# Altium PCB iq-adapter-v1.PcbDoc
Units mm, origin at the board's own origin, x right, y up, seen from the top; angles counter-clockwise.
Board outline 21.1 x 16.5 mm, 2 copper layers (Top Layer, Bottom Layer), stack 1.569 mm thick; 3 components, 9 nets, 76 pads, 13 vias.
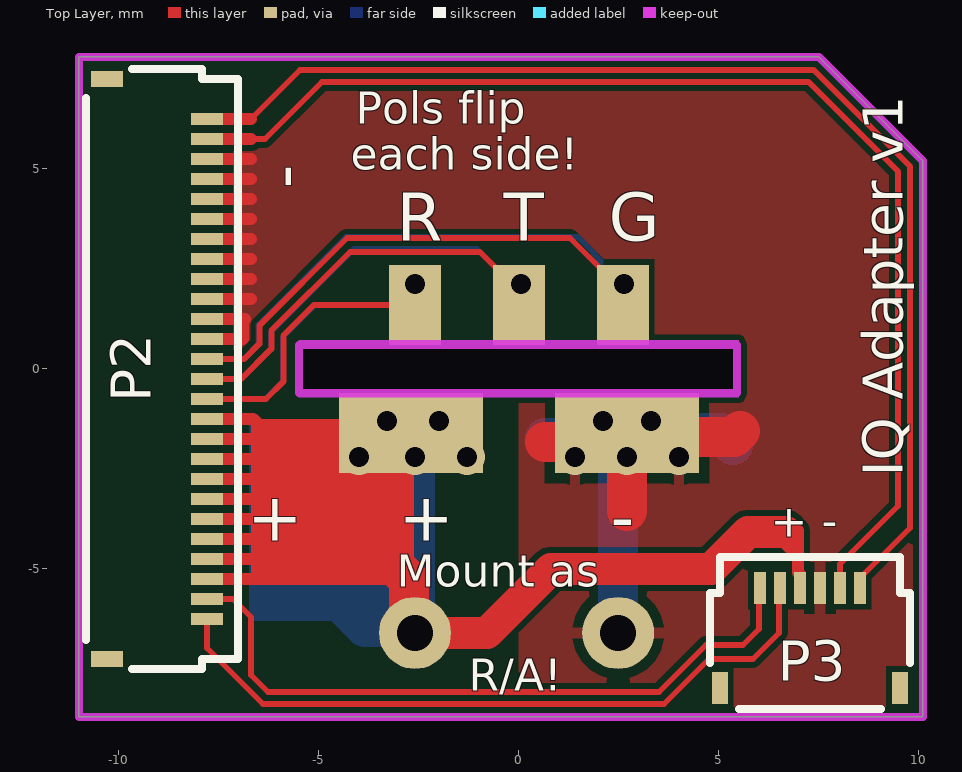
[diagram p0: Top Layer view]
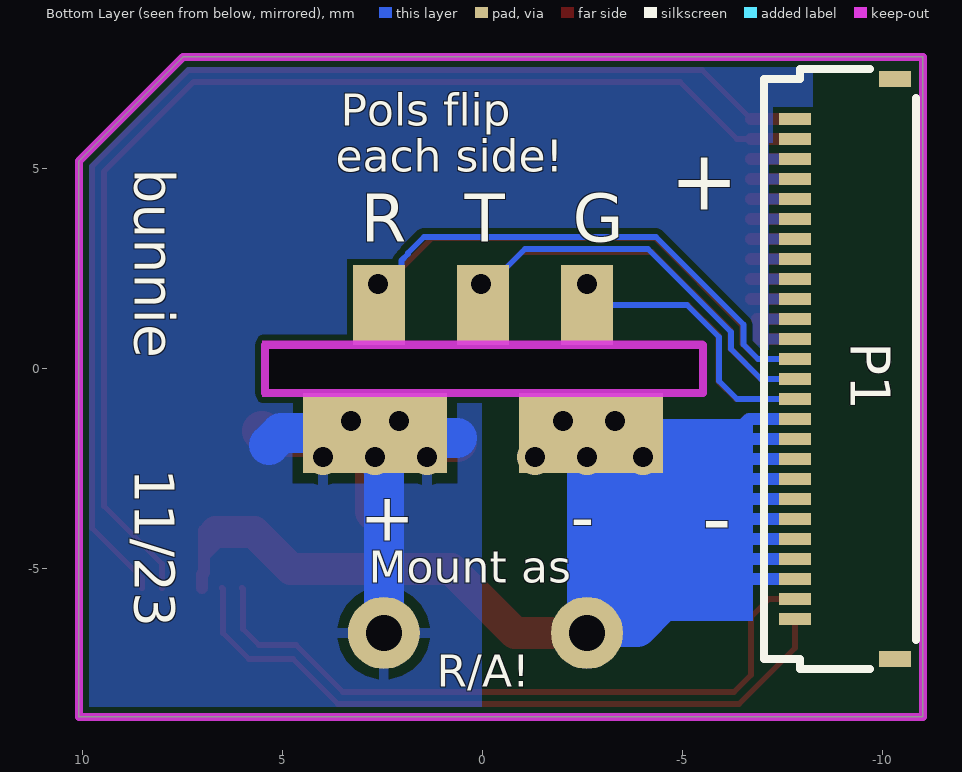
[diagram p1: Bottom Layer view, seen from below]

## Layer stack, top to bottom
Top Solder: solder mask 0.0254, SM-001, Dk 4
Top Layer: signal copper 0.035
Dielectric 1: core 1.4986, Core-043, Dk 4.3
Bottom Layer: signal copper 0.035
Bottom Solder: solder mask 0.0254, SM-001, Dk 4

## Board outline
-11,-8.7 10.1,-8.7 10.1,5.2 7.5,7.8 -11,7.8
cut-out: -5.5,0.6 5.45,0.6 5.45,-0.6 -5.5,-0.6
cut-out: -5.5,0.7 -5.5,-0.7 5.5,-0.7 5.5,0.7

## Design rules (kind name [scope] priority, off if disabled: settings)
Clearance [All] p1: gap=0.15 ignorepadtopadclearanceinfootprint=FALSE except(0: Arc-Hole Track-Hole SMDPad-Hole THPad-Hole Via-Hole Fill-Hole Poly-Hole Region-Hole Text-Hole)
PolygonConnect [All] p1: connectstyle=Relief reliefconductorwidth=0.254 reliefentries=4 polygonreliefangle="90 Angle" airgapwidth=0.254
RoutingVias [All] p1: holewidth=0.5 width=0.9 viastyle="Through Hole" minholewidth=0.5 minwidth=0.9 maxholewidth=0.5 maxwidth=0.9
SolderMaskExpansion [All] p1: expansion=0.102 istentingtop=FALSE
Width [All] p1: maxlimit=10 minlimit=0.15 preferedwidth=0.3
30 further rules are at their usual default settings.

## Components (designator, comment, footprint, x,y, rotation, side; value= is the part's Value field where it differs from the comment)
P1 "26-pin FPC" HRS_FH34SRJ-26S-0.5SH(50) -7.8,0 r90 bottom
P2 "26-pin FPC" HRS_FH34SRJ-26S-0.5SH(50) -7.8,0 r270 top
P3 "FH34SRJ-6S-0.5SH(50)" HRS_FH34SRJ-6S-0.5SH(50) 7.275,-5.475 r0 top

## Footprints (in the part's own frame and the unit in brackets; to place one, negate y for a bottom-side part, rotate by r counter-clockwise, add the part's x,y. Pads: shape width x height; smd on the part's side, far side on the other; paste and mask are expansions set on the pad)
HRS_FH34SRJ-6S-0.5SH(50) [mm] "Top/bottom entry, back-lock 0.3mm thick FPC, 6 pins"
  rect 0.4x0.8 smd mask+0.07: 0(-2.25,-2.5) 0(2.25,-2.5)
  rect 0.3x0.8 smd mask+0.07: 1(1.25,0) 2(0.75,0) 3(0.25,0) 4(-0.25,0) 5(-0.75,0) 6(-1.25,0)
  silkscreen extent -2.5,-3.03 2.5,0.77, body extent -2.5,-3.02 2.5,0.78, height 1
HRS_FH34SRJ-26S-0.5SH(50) [mm] "Top/bottom entry, back-lock 0.3mm thick FPC, 26 pins"
  rect 0.4x0.8 smd mask+0.07: 0(-7.25,-2.5) 0(7.25,-2.5)
  rect 0.3x0.8 smd mask+0.07: 1(6.25,0) 2(5.75,0) 3(5.25,0) 4(4.75,0) 5(4.25,0) 6(3.75,0) 7(3.25,0) 8(2.75,0) 9(2.25,0) 10(1.75,0) 11(1.25,0) 12(0.75,0) 13(0.25,0) 14(-0.25,0) 15(-0.75,0) 16(-1.25,0) 17(-1.75,0) 18(-2.25,0) 19(-2.75,0) 20(-3.25,0) 21(-3.75,0) 22(-4.25,0) 23(-4.75,0) 24(-5.25,0) 25(-5.75,0) 26(-6.25,0)
  silkscreen extent -7.5,-3.03 7.5,0.77, body extent -7.5,-3.03 7.5,0.77, height 1

## Part data
P1 P2: library part FPC-26, "26 Pin FPC header", MPN=FH34SRJ-26S-0.5SH(99), MYPN=J-FPC-0.5mm-26-0.3mm-T/B, System=Connector, VENDOR=Hirose
P3: library part "Header 6", "Header, 6-Pin", LatestRevisionDate=17-Jul-2002, LatestRevisionNote="Re-released for DXP Platform.", MPN=FH34SRJ-6S-0.5SH(50), MYPN=J-FH34SRJ-6S-0.5SH(50), Publisher="Altium Limited", VENDOR=HRS

## Free pads (board coordinates)
  rect 3.6x2 smd mask+0.07: 1(-2.7,-1.6) 1(2.7,-1.6)
  rect 3.6x2 smd far side mask+0.07: 1(-2.7,-1.6) 1(2.7,-1.6)
  round 1.8 hole 0.9 mask+0.07: 1(-2.6,-6.6) 5(2.48,-6.6)
  rect 1.3x2 smd mask+0.07: 2(-2.6,1.6) 3(2.6,1.6) 4(0,1.6)
  rect 1.3x2 smd far side mask+0.07: 2(2.6,1.6) 3(-2.6,1.6) 4(0,1.6)

## Via types
v1: diameter 0.9, hole 0.5, Top Layer to Bottom Layer, tented both sides, 13 vias

## Nets (pads, with @x,y where several pads share a name; then routed paths per layer and width w, separated by ;. In a path a pad name is that pad's centre, name@x,y a point inside that pad or via, vN(x,y) a via of type N, cw(c..) or ccw(c..) an arc to the next point about the centre after c; other vN are vias at no path point)
ESTOP1: P2.2 P3.6 | length 17.3
  Top Layer w0.15: P2.2 -7.15,-5.75 -6.7,-6.2 -6.7,-7.651 -6.276,-8.075 3.501,-8.075 4.676,-6.9 5.6,-6.9 6,-6.5 6,-5.5 P3.6
ESTOP2: P2.1 P3.5 | length 17.5
  Top Layer w0.15: P2.1 -7.8,-6.975 -6.4,-8.375 3.625,-8.375 4.75,-7.25 5.85,-7.25 6.5,-6.6 6.5,-5.5 P3.5
GND: P1.3 P1.4 P1.5 P1.6 P1.7 P1.8 P1.9 P1.10 P1.11 P1.12 P2.15 P2.16 P2.17 P2.18 P2.19 P2.20 P2.21 P2.22 P2.23 P2.24 P3.3 pad.1@2.7,-1.6 pad.5 | length 27.4
  Top Layer w0.3: P2.15 -6.9,0.75 -6.9,1.205 -6.855,1.25 P2.16 ; P2.17 -6.7,1.75 ; P2.18 -6.7,2.25 ; P2.19 -6.7,2.75 ; P2.20 -6.7,3.25 ; P2.21 -6.7,3.75 ; P2.22 -6.7,4.25 ; P2.23 -6.7,4.75 ; P2.24 -6.7,5.25
  Top Layer w1: 0.646,-1.827 2.573,-1.827 pad.1@2.7,-1.7 ; 2.7,-3.55 v1(2.7,-2.2) pad.1@2.7,-1.7 ; 5.525,-1.55 5.375,-1.7 pad.1@2.7,-1.7
  Bottom Layer w1: 0.646,-1.727 2.573,-1.727 2.7,-1.6 5.05,-1.6 5.35,-1.9 ; pad.5 2.48,-2.42 v1(2.7,-2.2)
  other v1: 1.4,-2.2 4,-2.2 2.1,-1.3 3.3,-1.3
P24V: P1.16 P1.17 P1.18 P1.19 P1.20 P1.21 P1.22 P1.23 P1.24 P2.3 P2.4 P2.5 P2.6 P2.7 P2.8 P2.9 P2.10 P2.11 P3.4 pad.1@-2.6,-6.6 pad.1@-2.7,-1.6 | length 43.7
  Top Layer w0.3: P2.3 -6.7,-5.25 ; P2.4 -6.7,-4.75 ; P2.5 -6.7,-4.25 ; P2.6 -6.7,-3.75 ; P2.7 -6.7,-3.25 ; P2.8 -6.7,-2.75 ; P2.9 -6.7,-2.25 ; P2.10 -6.7,-1.75 ; P2.11 -6.65,-1.25 -6.4,-1.5 ; 6.614,-4.312 6.975,-4.674 ; 6.675,-4.075 6.975,-4.375 ; 6.947,-4.007 6.975,-4.035 6.975,-4.375 ; P3.4 7.025,-5.137 6.975,-5.087 6.975,-4.674 ; 6.975,-4.674 6.975,-4.375
  Top Layer w0.8: pad.1@-2.6,-6.6 -0.8,-6.6 0.8,-5 4.8,-5 5.725,-4.075 6.675,-4.075
  Top Layer w1: -4.663,-3.325 -4.663,-3.363 -2.753,-5.272 -2.753,-6.447 pad.1@-2.6,-6.6
  Bottom Layer w0.3: P1.24 -6.75,-5.25 ; P1.23 -6.75,-4.75 ; P1.22 -6.75,-4.25 ; P1.21 -6.75,-3.75 ; P1.20 -6.75,-3.25 ; P1.19 -6.75,-2.75 ; P1.18 -6.75,-2.25 ; P1.17 -6.75,-1.75 ; P1.16 -6.65,-1.25 -6.3,-1.6
  Bottom Layer w1: -4.4,-5.9 -3.853,-6.447 -2.753,-6.447 -2.6,-6.6 v1(-2.6,-2.2)
  other v1: -4,-2.2 -1.3,-2.2 -3.3,-1.3 -2,-1.3
RX: P1.15 P2.12 pad.2@-2.6,1.6 pad.3@-2.6,1.6 | length 13.7
  Top Layer w0.15: P2.12 -6.325,-0.75 -5.89,-0.315 -5.89,0.837 -5.127,1.6 pad.2@-2.6,1.6
  Bottom Layer w0.15: P1.15 -6.35,-0.75 -5.9,-0.3 -5.9,0.8 -5.1,1.6 pad.3@-2.6,1.6
  other v1: -2.6,2.125
SGND: P1.13 P2.14 pad.2@2.6,1.6 pad.3@2.6,1.6 | length 25
  Top Layer w0.15: P2.14 -6.87,0.25 -6.49,0.63 -6.49,1.085 -4.3,3.275 1.275,3.275 pad.3@2.525,2.025
  Bottom Layer w0.15: P1.13 -6.874,0.25 -6.512,0.612 -6.512,1.113 -4.325,3.3 1.475,3.3 1.875,2.9 1.875,2.875 2.041,2.709 2.041,2.525 2.441,2.125 v1(2.625,2.125)
TX: P1.14 P2.13 pad.4 | length 19.5
  Top Layer w0.15: P2.13 -6.945,-0.25 -6.19,0.506 -6.19,0.961 -4.226,2.925 -0.975,2.925 pad.4@-0.063,2.013
  Bottom Layer w0.15: P1.14 -6.95,-0.25 -6.2,0.5 -6.2,0.924 -4.124,3 -1.05,3 -0.175,2.125 v1(0.05,2.125)
UART1_RX: P2.25 P3.2 | length 29.8
  Top Layer w0.15: -6.7,5.75 -6.35,5.75 -4.925,7.175 7.241,7.175 9.475,4.941 9.475,-3.425 8.025,-4.875 P3.2
  Top Layer w0.3: P2.25 -6.7,5.75
UART1_TX: P2.26 P3.1 | length 30.1
  Top Layer w0.15: -6.7,6.25 -5.475,7.475 7.365,7.475 9.775,5.065 9.775,-3.975 8.525,-5.225 P3.1
  Top Layer w0.3: P2.26 -6.7,6.25
pads on no net: P1.0 P1.1 P1.2 P1.25 P1.26 P2.0 P3.0

## Polygon pours and split planes (outlines as drawn)
GND on Bottom Layer "GND_L02_P001" (solid, remove dead copper, pour order 1): -0.025,-0.6 0.025,-0.65 0.025,-8.7 10.1,-8.7 10.1,7.9 -8.2,7.9 -8.25,7.85 -8.25,-0.7 -0.125,-0.7
GND on Top Layer "GND_L01_P000" (solid, remove dead copper, pour order 0): -7.8,0.25 -7.65,0.4 -7.65,7.825 8.925,7.825 10.1,9 10.1,-8.7 1.125,-8.7 0,-7.575 0,-0.7

## Keep-outs
Keep-Out Layer:
  lines w0.2: -11,-8.7 10.1,-8.7 10.1,5.2 7.5,7.8 -11,7.8 -11,-8.7 ; -5.5,-0.6 5.45,-0.6 5.45,0.6 -5.5,0.6 -5.5,-0.6

## Other copper
Top Layer:
  rectangle net P24V: -6.7,-5.4 -2.625,-1.25
Bottom Layer:
  rectangle net P24V: -6.75,-6.3 -2.7,-1.25

## Silkscreen, mask and mechanical layers (free items; w line width, h text height)
Top Overlay:
  text "Pols flip" at -4.075,6.125 h0.8
  text "-" at -5.3,5.1 h1.2 r90
  text "each side!" at -4.2,4.975 h0.8
  text "R" at -3.05,3.2 h1.2
  text "T" at -0.375,3.2 h1.2
  text "G" at 2.25,3.2 h1.2
  text "IQ Adapter v1" at 9.6,-2.7 h1 r90
  text "+ -" at 6.3,-4.2 h0.8
  text "+" at -5.4,-4.3 h1.2
  text "+" at -3,-4.3 h1.2
  text "-" at 2.3,-4.3 h1.2
  text "Mount as" at -3.05,-5.45 h0.8
  text "R/A!" at -1.25,-8.05 h0.8
Bottom Overlay:
  text "Pols flip" at 3.55,6.075 h0.8
  text "bunnie" at 8.7,5 h1 r90
  text "each side!" at 3.675,4.925 h0.8
  text "+" at -6.4,3.975 h1.5
  text "G" at -2.25,3.175 h1.2
  text "T" at 0.45,3.175 h1.2
  text "R" at 3.05,3.175 h1.2
  text "11/23" at 8.7,-2.5 h1 r90
  text "-" at -2.2,-4.3 h1.2
  text "+" at 3.075,-4.3 h1.2
  text "-" at -6.225,-4.45 h1.5
  text "Mount as" at 2.85,-5.35 h0.8
  text "R/A!" at 1.15,-7.95 h0.8
Mechanical 1:
  rectangle: -4.1,-24.63 4.1,-9
  lines w0.2: -4.5,-0.6 -0.9,-0.6 ; -4.5,0 4.5,0 ; -3.19,0.635 -1.89,0.635 ; -0.65,0.5 0.65,0.5 ; 0.9,-0.6 4.5,-0.6 ; 1.89,0.635 3.19,0.635
  text "R" at -3.05,1.2 h1.2
  text "T" at 0.3,1.2 h1.2
  text "-" at 3.8,0.85 h1.2
  text "-" at 3.3,-2.15 h1.2
  text "+" at -2.2,-2.25 h1.2
  text "Cap at right-angle: be sure to clear motor and carriage plate!" at -9.55,-26.683 h0.8
Mechanical 3:
  lines w0.2: 5.45,0.7 8.65,3.9 15.1,3.9 ; -11,-8.7 10.1,-8.7 10.1,5.2 7.5,7.8 -11,7.8 -11,-8.7 ; -5.5,-0.6 -5.5,0.6 5.45,0.6 5.45,-0.6 -5.5,-0.6
  lines w0.381: -15.336,20.304 -4.924,20.304 18.692,20.304 33.928,20.304 50.434,20.304 64.908,20.304 ; -15.336,23.352 -4.924,23.352 18.692,23.352 33.928,23.352 50.434,23.352 64.908,23.352 ; -15.336,26.4 -4.924,26.4 18.692,26.4 33.928,26.4 50.434,26.4 64.908,26.4 ; -15.336,29.448 -4.924,29.448 18.692,29.448 33.928,29.448 50.434,29.448 64.908,29.448 ; -15.336,32.496 -4.924,32.496 18.692,32.496 33.928,32.496 50.434,32.496 64.908,32.496 ; -15.336,35.544 -4.924,35.544 18.692,35.544 33.928,35.544 50.434,35.544 64.908,35.544 ; -15.336,38.592 64.908,38.592 ; -4.924,41.64 -4.924,17.256 ; 18.692,41.64 18.692,17.256 ; 33.928,41.64 33.928,17.256 ; 50.434,41.64 50.434,17.256 ; -4.924,17.256 -15.336,17.256 -15.336,41.64 64.908,41.64 64.908,17.256 50.434,17.256 ; -4.924,17.256 18.692,17.256 ; 18.692,17.256 33.928,17.256 ; 33.928,17.256 50.434,17.256
  text "Layer" at -13.558,39.354 h1.52
  text "Name" at -3.146,39.354 h1.52
  text "Material" at 20.47,39.354 h1.52
  text "Thickness" at 35.706,39.354 h1.52
  text "Constant" at 52.212,39.354 h1.52
  text "Top Overlay" at -3.146,36.306 h1.52
  text "Top Solder" at -3.146,33.258 h1.52
  text "SM-001" at 20.47,33.258 h1.52
  text "0.025mm" at 35.706,33.258 h1.52
  text "4" at 52.212,33.258 h1.52
  text "1" at -13.558,30.21 h1.52
  text "Top Layer" at -3.146,30.21 h1.52
  text "CF-004" at 20.47,30.21 h1.52
  text "0.035mm" at 35.706,30.21 h1.52
  text "Dielectric 1" at -3.146,27.162 h1.52
  text "Core-043" at 20.47,27.162 h1.52
  text "1.499mm" at 35.706,27.162 h1.52
  text "4.3" at 52.212,27.162 h1.52
  text "2" at -13.558,24.114 h1.52
  text "Bottom Layer" at -3.146,24.114 h1.52
  text "CF-004" at 20.47,24.114 h1.52
  text "0.035mm" at 35.706,24.114 h1.52
  text "Bottom Solder" at -3.146,21.066 h1.52
  text "SM-001" at 20.47,21.066 h1.52
  text "0.025mm" at 35.706,21.066 h1.52
  text "4" at 52.212,21.066 h1.52
  text "Bottom Overlay" at -3.146,18.018 h1.52
  text "Silkscreen: white / Soldermask: green" at -2.8,14.2 h1.5
  text "HASL finish" at -2.7,10.7 h1.5
  text "-0/+0.1mm" at -16.5,3.8 h1.5 r90
  text "Internal cut-out" at 16.1,3.5 h1.5
  text "Cut along copper edge" at 16.2,0.8 h1.5
  text "Do not add radius of more than 1mm" at 16.4,-2 h1.5
  text "+/-0.1mm" at 7,-11.7 h1.5

## Dimensions
-5.5,0.6 to -5.5,-0.6 on Mechanical 3
-5.5,-0.6 to 5.5,-1 on Mechanical 3